# EAGLE board CT_schematic (EAGLE 7.6.0)

Size 100 x 80 mm. Coordinates in mm from the lower left corner, seen from the top.
Outline: 0,0 100,0 100,80 0,80 0,0
Copper layers (1*16): Top 0.035mm / dielectric 1.5mm / Bottom 0.035mm
Design rules "default": minimum track width 10mil, minimum drill 24mil, track to track 8mil, track to pad 8mil, pad to pad 8mil, via to via 8mil, smd to smd 8mil, copper to edge 40mil, drill to drill 8mil, minimum pad ring 10mil, minimum via ring 8mil, stop-mask expansion 4mil, vias tented up to drill 0mil, thermal gap 10mil

## Footprints (pad centres in the part's own frame; a part is rotated, then mirrored left to right if it is on the bottom)
C0603 = smd 0.8 x 0.8: 1 -0.762,0; 2 0.762,0
C0402 = smd 0.5 x 0.5: 1 -0.508,0; 2 0.508,0
C0805 = smd 1.2 x 1.3: 1 -1.016,0; 2 1.016,0
C1206 = smd 1.3 x 1.6: 1 -1.524,0; 2 1.524,0
L0603 = smd 0.8 x 0.8: 1 -0.762,0; 2 0.762,0
L0806 = smd 1.016 x 1.524: 1 -0.889,0; 2 0.889,0
R0603 = smd 0.8 x 0.8: 1 -0.762,0; 2 0.762,0
LQFP144 = smd 0.35 x 1.35: 1 -8.75,-10.625; 2 -8.25,-10.625; 3 -7.75,-10.625; 4 -7.25,-10.625; 5 -6.75,-10.625; 6 -6.25,-10.625; 7 -5.75,-10.625; 8 -5.25,-10.625; 9 -4.75,-10.625; 10 -4.25,-10.625; 11 -3.75,-10.625; 12 -3.25,-10.625; 13 -2.75,-10.62; 14 -2.25,-10.625; 15 -1.75,-10.625; 16 -1.25,-10.625; 17 -0.75,-10.625; 18 -0.25,-10.625; 19 0.25,-10.625; 20 0.75,-10.625; 21 1.25,-10.625; 22 1.75,-10.625; 23 2.25,-10.625; 24 2.75,-10.62; 25 3.25,-10.625; 26 3.75,-10.625; 27 4.25,-10.625; 28 4.75,-10.625; 29 5.25,-10.625; 30 5.75,-10.625; 31 6.25,-10.625; 32 6.75,-10.625; 33 7.25,-10.625; 34 7.75,-10.625; 35 8.25,-10.625; 36 8.75,-10.625; 73 8.75,10.625; 74 8.25,10.625; 75 7.75,10.625; 76 7.25,10.625; 77 6.75,10.625; 78 6.25,10.625; 79 5.75,10.625; 80 5.25,10.625; 81 4.75,10.625; 82 4.25,10.625; 83 3.75,10.625; 84 3.25,10.625; 85 2.75,10.625; 86 2.25,10.625; 87 1.75,10.625; 88 1.25,10.625; 89 0.75,10.625; 90 0.25,10.625; 91 -0.25,10.625; 92 -0.75,10.625; 93 -1.25,10.625; 94 -1.75,10.625; 95 -2.25,10.625; 96 -2.75,10.625; 97 -3.25,10.625; 98 -3.75,10.625; 99 -4.25,10.625; 100 -4.75,10.625; 101 -5.25,10.625; 102 -5.75,10.625; 103 -6.25,10.625; 104 -6.75,10.625; 105 -7.25,10.625; 106 -7.75,10.625; 107 -8.25,10.625; 108 -8.75,10.625 | smd 1.35 x 0.35: 37 10.625,-8.75; 38 10.625,-8.25; 39 10.625,-7.75; 40 10.625,-7.25; 41 10.625,-6.75; 42 10.625,-6.25; 43 10.625,-5.75; 44 10.625,-5.25; 45 10.625,-4.75; 46 10.625,-4.25; 47 10.625,-3.75; 48 10.625,-3.25; 49 10.625,-2.75; 50 10.625,-2.25; 51 10.625,-1.75; 52 10.625,-1.25; 53 10.625,-0.75; 54 10.625,-0.25; 55 10.625,0.25; 56 10.625,0.75; 57 10.625,1.25; 58 10.625,1.75; 59 10.625,2.25; 60 10.625,2.75; 61 10.625,3.25; 62 10.625,3.75; 63 10.625,4.25; 64 10.625,4.75; 65 10.625,5.25; 66 10.625,5.75; 67 10.625,6.25; 68 10.625,6.75; 69 10.625,7.25; 70 10.625,7.75; 71 10.625,8.25; 72 10.625,8.75; 109 -10.625,8.75; 110 -10.625,8.25; 111 -10.625,7.75; 112 -10.625,7.25; 113 -10.625,6.75; 114 -10.625,6.25; 115 -10.625,5.75; 116 -10.625,5.25; 117 -10.625,4.75; 118 -10.625,4.25; 119 -10.625,3.75; 120 -10.625,3.25; 121 -10.625,2.75; 122 -10.625,2.25; 123 -10.625,1.75; 124 -10.625,1.25; 125 -10.625,0.75; 126 -10.625,0.25; 127 -10.625,-0.25; 128 -10.625,-0.75; 129 -10.625,-1.25; 130 -10.625,-1.75; 131 -10.625,-2.25; 132 -10.625,-2.75; 133 -10.625,-3.25; 134 -10.625,-3.75; 135 -10.625,-4.25; 136 -10.625,-4.75; 137 -10.625,-5.25; 138 -10.625,-5.75; 139 -10.625,-6.25; 140 -10.625,-6.75; 141 -10.625,-7.25; 142 -10.625,-7.75; 143 -10.625,-8.25; 144 -10.625,-8.75
SOIC-8 = smd 1.6 x 0.6: 1 -2.7,1.905 | smd 1.55 x 0.6: 2 -2.7,0.635; 3 -2.7,-0.635; 4 -2.7,-1.905; 5 2.7,-1.905; 6 2.7,-0.635; 7 2.7,0.635; 8 2.7,1.905
MBH7BLZ02-109004 = smd 0.5 x 0.5: 1 0,0; 15 9.85,0; 27 9.85,8.45; 41 0,8.45 | smd 0.45 x 0.5: 2 0.725,0; 3 1.425,0; 4 2.125,0; 5 2.825,0; 6 3.525,0; 7 4.225,0; 8 4.925,0; 9 5.625,0; 10 6.325,0; 11 7.025,0; 12 7.725,0; 13 8.425,0; 14 9.125,0 | smd 0.5 x 0.45: 16 9.85,0.725; 17 9.85,1.425; 18 9.85,2.125; 19 9.85,2.825; 20 9.85,3.525; 21 9.85,4.225; 22 9.85,4.925; 23 9.85,5.625; 24 9.85,6.325; 25 9.85,7.025; 26 9.85,7.725; 28 9.15,8.45; 29 8.45,8.45; 30 7.75,8.45; 31 7.05,8.45; 32 6.35,8.45; 33 5.65,8.45; 34 4.95,8.45; 35 4.25,8.45; 36 3.55,8.45; 37 2.85,8.45; 38 2.15,8.45; 39 1.45,8.45; 40 0.75,8.45; 42 0,7.75; 43 0,7.05; 44 0,6.35; 45 0,5.65; 46 0,4.95; 47 0,4.25; 48 0,3.55; 49 0,2.85; 50 0,2.15; 51 0,1.45; 52 0,0.75 | smd 3 x 2.5: 53 3.225,2.775; 54 6.625,2.775; 55 6.625,5.675; 56 3.225,5.675
TDFN-8/6MM = smd 0.3 x 0.75: 1 0,0; 2 0.5,0; 3 1,0; 4 1.5,0; 5 1.5,3; 6 1,3; 7 0.5,3; 8 0,3
FCI_10118193-0001LF = smd 0.4 x 1.35: 1 -1.3,2.675; 2 -0.65,2.675; 3 0,2.675; 4 0.65,2.675; 5 1.3,2.675 | smd 1.6 x 1.4: 6 -3.2,2.45; 7 3.2,2.45 | smd 1.9 x 1.9: 8 -1.2,0; 9 1.2,0 | hole 0.5: -3.3,0; 3.3,0
SOT143B = smd 1 x 0.7: 1 -0.75,-1 | smd 0.6 x 0.7: 2 0.95,-1; 3 0.95,1; 4 -0.95,1
ABS07-32.768KHZ-7-T = smd 1.1 x 2.4: 1 -2.5,0; 2 0,0
ASFL1 = smd 1.7 x 1.5: 1 -1.27,-1.1; 2 1.27,-1.1; 3 1.27,1.1; 4 -1.27,1.1
TSOT-23-5 = smd 1.3 x 0.62: 1 -1.31,0.95; 2 -1.31,0; 3 -1.31,-0.95; 4 1.31,-0.95; 5 1.31,0.95
DFN8_2X3MC = smd 0.813 x 0.305: 1 -1.398,0.75; 2 -1.398,0.25; 3 -1.398,-0.25; 4 -1.398,-0.75; 5 1.398,-0.75; 6 1.398,-0.25; 7 1.398,0.25; 8 1.398,0.75 | smd 1.753 x 1.549: 9 0,0
JST-2-SMD = smd 1 x 4.6: 1 -1,-3.7; 2 1,-3.7 | smd 1.6 x 3.4: NC1 -3.4,1.5; NC2 3.4,1.5
SON-6 = smd 0.55 x 0.3: 1 -0.355,0.5 | smd 0.52 x 0.3: 2 -0.37,0; 3 -0.37,-0.5; 4 0.37,-0.5; 5 0.37,0; 6 0.37,0.5
SW_4-1437565-2 = smd 1.4 x 2.1: 1 -2.23,4.55; 2 -2.23,-4.55; 3 2.23,4.55; 4 2.23,-4.55
LGM67K-G1J2-24-Z = smd 0.8 x 1.4: A -2,0; C 0,0
NC7SZ125M5X = smd 1.3 x 0.7: 1 -1.3,0.95; 2 -1.3,0; 3 -1.3,-0.95; 4 1.3,-0.95; 5 1.3,0.95

## Placement (x,y rotation side)
C1  1e-06  [C0603]  -43.18,62.23 0 top  (outside the outline)
C2  1e-07  [C0603]  -46.99,62.23 0 top  (outside the outline)
C3  1e-07  [C0603]  -50.8,62.23 0 top  (outside the outline)
C4  1e-07  [C0603]  -54.61,62.23 0 top  (outside the outline)
C5  1e-07  [C0603]  -58.42,62.23 0 top  (outside the outline)
C6  1e-07  [C0603]  -62.23,62.23 0 top  (outside the outline)
C7  1e-07  [C0603]  -66.04,62.23 0 top  (outside the outline)
C8  1e-07  [C0603]  -15.24,67.31 0 top  (outside the outline)
C9  1e-07  [C0603]  -19.05,67.31 0 top  (outside the outline)
C10  1e-07  [C0603]  -22.86,67.31 0 top  (outside the outline)
C11  1e-07  [C0603]  -26.67,67.31 0 top  (outside the outline)
C12  1e-07  [C0603]  -30.48,67.31 0 top  (outside the outline)
C13  1e-07  [C0603]  -34.29,67.31 0 top  (outside the outline)
C14  4.7e-06  [C0603]  -39.37,62.23 0 top  (outside the outline)
C15  1e-08  [C0603]  -38.1,67.31 0 top  (outside the outline)
C16  1e-08  [C0603]  -41.91,67.31 0 top  (outside the outline)
C17  1e-06  [C0603]  -45.72,67.31 0 top  (outside the outline)
C18  1e-11  [C0402]  -26.67,72.39 0 top  (outside the outline)
C19  1e-11  [C0402]  -30.48,72.39 0 top  (outside the outline)
C20  1e-08  [C0402]  -34.29,72.39 0 top  (outside the outline)
C21  1e-07  [C0402]  -38.1,72.39 0 top  (outside the outline)
C22  1e-07  [C0402]  -41.91,72.39 0 top  (outside the outline)
C23  1e-08  [C0402]  -45.72,72.39 0 top  (outside the outline)
C24  1e-08  [C0402]  -49.53,72.39 0 top  (outside the outline)
C25  1e-05  [C0805]  -21.59,55.88 0 top  (outside the outline)
C26  1e-05  [C0805]  -26.67,55.88 0 top  (outside the outline)
C27  1e-07  [C0402]  -53.34,72.39 0 top  (outside the outline)
C28  1e-05  [C1206]  -48.26,48.26 0 top  (outside the outline)
C29  1e-05  [C1206]  -54.61,48.26 0 top  (outside the outline)
C30  1e-08  [C0402]  -57.15,72.39 0 top  (outside the outline)
C31  1e-08  [C0402]  -60.96,72.39 0 top  (outside the outline)
F1  240.0  [L0603]  -49.53,67.31 0 top  (outside the outline)
I1  1.5e-06  [L0806]  -60.96,48.26 0 top  (outside the outline)
R2  1000.0  [R0603]  -53.34,67.31 0 top  (outside the outline)
R4  4700.0  [R0603]  -57.15,67.31 0 top  (outside the outline)
R5  4700.0  [R0603]  -60.96,67.31 0 top  (outside the outline)
R6  2200.0  [R0603]  -64.77,67.31 0 top  (outside the outline)
R7  2200.0  [R0603]  -15.24,72.39 0 top  (outside the outline)
R8  10000.0  [R0603]  -59.69,55.88 0 top  (outside the outline)
R9  10000.0  [R0603]  -64.77,55.88 0 top  (outside the outline)
R10  10000.0  [R0603]  -15.24,62.23 0 top  (outside the outline)
R11  10000.0  [R0603]  -20.32,62.23 0 top  (outside the outline)
R12  220000.0  [R0603]  -44.45,55.88 0 top  (outside the outline)
R13  1000000.0  [R0603]  -39.37,55.88 0 top  (outside the outline)
R14  10000.0  [R0603]  -25.4,62.23 0 top  (outside the outline)
R15  10000.0  [R0603]  -30.48,62.23 0 top  (outside the outline)
R16  9100.0  [R0603]  -19.05,72.39 0 top  (outside the outline)
R17  680000.0  [R0603]  -49.53,55.88 0 top  (outside the outline)
R18  120000.0  [R0603]  -54.61,55.88 0 top  (outside the outline)
R19  2000.0  [R0603]  -22.86,72.39 0 top  (outside the outline)
R20  10000.0  [R0603]  -35.56,62.23 0 top  (outside the outline)
U1  stm32f103zdt7  [LQFP144]  -24.13,11.43 0 top  (outside the outline)
U2  AT25640B-SSHL-T  [SOIC-8]  -24.13,40.64 0 top  (outside the outline)
U3  MBH7BLZ02-109004  [MBH7BLZ02-109004]  -58.42,1.27 0 top  (outside the outline)
U4  24AA08T-I/MNY  [TDFN-8/6MM]  -58.42,26.67 0 top  (outside the outline)
U5  10118193-0001LF  [FCI_10118193-0001LF]  -50.8,39.37 0 top  (outside the outline)
U6  prtr5v0u2ax  [SOT143B]  -24.13,77.47 0 top  (outside the outline)
U7  ABS07-32.768KHZ-7-T  [ABS07-32.768KHZ-7-T]  -27.94,49.53 0 top  (outside the outline)
U8  ASFL1-25MHZ-NCS  [ASFL1]  -41.91,39.37 0 top  (outside the outline)
U9  ltc3406es5  [TSOT-23-5]  -31.75,54.61 0 top  (outside the outline)
U10  MCP73831T-2ACI/MC  [DFN8_2X3MC]  -34.29,76.2 0 top  (outside the outline)
U11  S2B-PH-SM4-TB(LF)(SN)  [JST-2-SMD]  -41.91,29.21 0 top  (outside the outline)
U12  TPS3895ADRYR  [SON-6]  -27.94,76.2 0 top  (outside the outline)
U13  4-1437565-2  [SW_4-1437565-2]  -27.94,29.21 0 top  (outside the outline)
U14  Q65110A2395  [LGM67K-G1J2-24-Z]  -36.83,48.26 0 top  (outside the outline)
U15  nc7sz125m5x  [NC7SZ125M5X]  -66.04,46.99 0 top  (outside the outline)
U16  nc7sz125m5x  [NC7SZ125M5X]  -15.24,55.88 0 top  (outside the outline)

## Library data of the parts
C1-C31 F1 I1 R2 R4-R20 U1-U16 = circuit_tree

## Nets
CLK_CRYSTAL_U1_8: C18.1 U1.8 U7.1
CLK_CRYSTAL_U1_9: C19.1 U1.9 U7.2
CLK_U1_23: U1.23 U8.3
GND: C1.2 C2.2 C3.2 C4.2 C5.2 C6.2 C7.2 C8.2 C9.2 C10.2 C11.2 C12.2 C13.2 C14.2 C15.2 C16.2 C17.2 C18.2 C19.2 C20.2 C21.2 C22.2 C23.2 C24.2 C25.2 C26.1 C26.2 C27.2 C28.2 C29.2 C30.2 C31.2 R2.2 R8.2 R12.2 R16.2 R18.2 R19.2 U1.16 U1.30 U1.31 U1.38 U1.51 U1.61 U1.71 U1.83 U1.94 U1.107 U1.120 U1.130 U1.143 U2.4 U3.1 U3.3 U3.15 U3.27 U3.29 U3.41 U3.42 U3.43 U3.44 U3.45 U3.46 U3.47 U3.48 U3.49 U3.50 U3.52 U3.53 U3.54 U3.55 U3.56 U4.4 U5.5 U5.6 U5.7 U5.8 U5.9 U6.1 U8.2 U9.2 U10.6 U10.9 U11.2 U12.2 U14.C U15.1 U15.3 U16.1 U16.3
INPUT_USBPOWER_5V: C28.1 R20.2 U5.1 U6.4 U10.1 U10.2
NET_U1_25: R5.1 U1.25 U16.4
NET_U1_33: C15.1 C16.1 C17.1 F1.1 U1.32 U1.33
NET_U1_136: R6.1 U1.136 U4.6
NET_U1_137: R7.1 U1.137 U4.5
NET_U1_138: R8.1 U1.138
NET_U1_141: U14.A
NET_U1_142: U13.3 U13.4
NET_U2_3: R9.1 U2.3
NET_U2_7: R11.1 U2.7
NET_U3_39: R4.1 U3.39 U15.4
NET_U9_1: U9.1
NET_U9_3: I1.1 U9.3
NET_U9_5: R12.1 R13.1 U9.5
NET_U9_ATNET_3: I1.2 R13.2
NET_U10_5: R20.1 U10.5
NET_U10_8: R19.1 U10.8
NET_U12_1: R15.1 R16.1 U12.1
NET_U12_3: R17.2 R18.1 U12.3
NET_U12_4: R14.1 U12.4 U15.2 U16.2
NET_U13_1: R2.1 U13.1 U13.2
PROC_SPI1_MISO: U1.42 U2.2
PROC_SPI1_MOSI: U1.43 U2.5
PROC_SPI1_NSS: R10.1 U1.40 U2.1
PROC_SPI1_SCK: U1.41 U2.6
PROC_UART4_RX: U1.112 U3.25
PROC_UART4_TX: U1.111 U3.23
PROC_USB_DM: U1.103 U5.2 U6.3
PROC_USB_DP: U1.104 U5.3 U6.2
VCC_S1_3V7: C25.1 C29.1 U9.4 U10.3 U10.4 U11.1
VCC_TIER1_3V3: C1.1 C2.1 C3.1 C4.1 C5.1 C6.1 C7.1 C8.1 C9.1 C10.1 C11.1 C12.1 C13.1 C14.1 C20.1 C21.1 C22.1 C23.1 C24.1 C26.2 C27.1 C30.1 C31.1 F1.2 I1.2 R4.2 R5.2 R6.2 R7.2 R9.2 R10.2 R11.2 R13.2 R14.2 R15.2 R17.1 U1.6 U1.17 U1.39 U1.52 U1.62 U1.72 U1.84 U1.95 U1.108 U1.121 U1.131 U1.144 U2.8 U3.28 U4.7 U4.8 U8.4 U12.6 U15.5 U16.5

## Tracks (layer width: path | path; a pad name or v marks a point on that pad's centre or on a via)
CLK_CRYSTAL_U1_8  (2 unrouted)
CLK_CRYSTAL_U1_9  (2 unrouted)
CLK_U1_23  (1 unrouted)
GND  (89 unrouted)
INPUT_USBPOWER_5V  (5 unrouted)
NET_U1_25  (2 unrouted)
NET_U1_33  (5 unrouted)
NET_U1_136  (2 unrouted)
NET_U1_137  (2 unrouted)
NET_U1_138  (1 unrouted)
NET_U1_142  (1 unrouted)
NET_U2_3  (1 unrouted)
NET_U2_7  (1 unrouted)
NET_U3_39  (2 unrouted)
NET_U9_3  (1 unrouted)
NET_U9_5  (2 unrouted)
NET_U9_ATNET_3  (1 unrouted)
NET_U10_5  (1 unrouted)
NET_U10_8  (1 unrouted)
NET_U12_1  (2 unrouted)
NET_U12_3  (2 unrouted)
NET_U12_4  (3 unrouted)
NET_U13_1  (2 unrouted)
PROC_SPI1_MISO  (1 unrouted)
PROC_SPI1_MOSI  (1 unrouted)
PROC_SPI1_NSS  (2 unrouted)
PROC_SPI1_SCK  (1 unrouted)
PROC_UART4_RX  (1 unrouted)
PROC_UART4_TX  (1 unrouted)
PROC_USB_DM  (2 unrouted)
PROC_USB_DP  (2 unrouted)
VCC_S1_3V7  (5 unrouted)
VCC_TIER1_3V3  (55 unrouted)